# Altium PCB PCB1.pcbdoc (part 1 of 4)
Units mil, origin at the board's own origin, x right, y up, seen from the top; angles counter-clockwise.
Board outline 3067 x 4292.31 mil, 4 copper layers (Top Layer, Inner1, Inner2, Bottom Layer); 120 components, 131 nets, 693 pads, 342 vias.
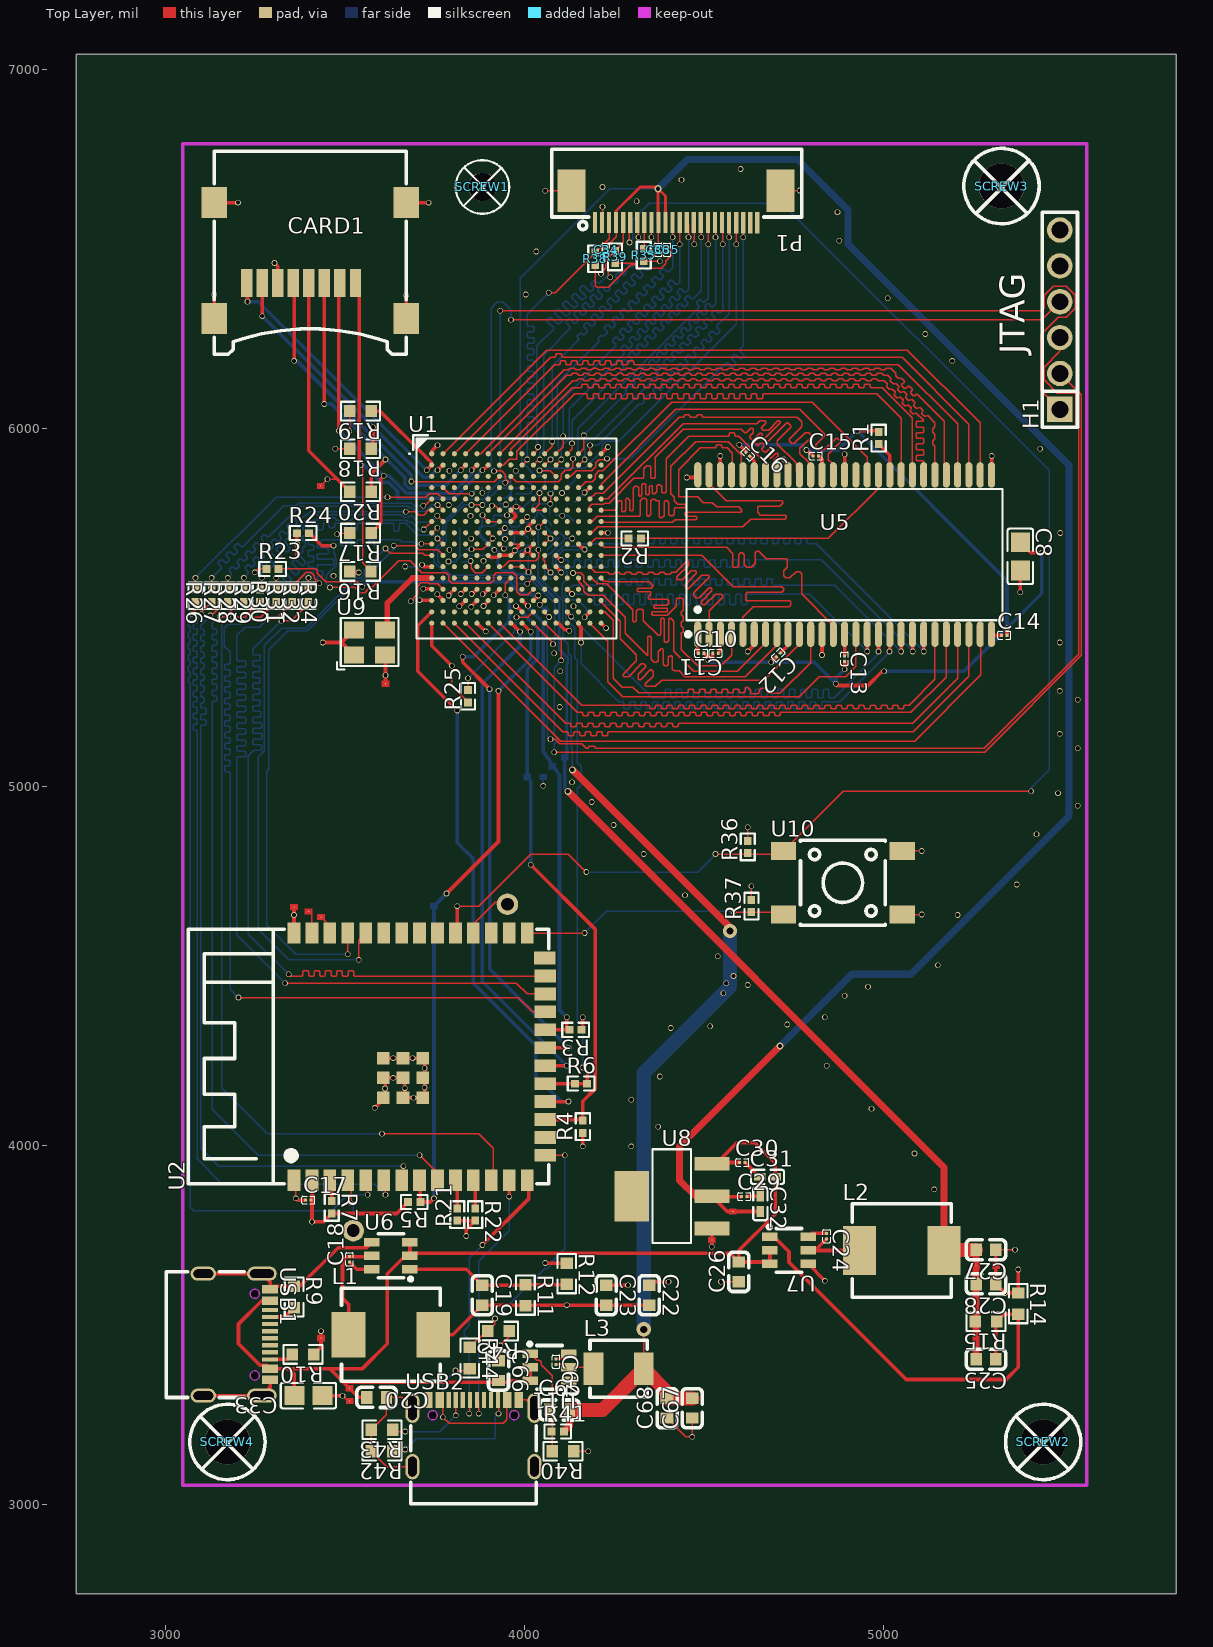
[diagram p0: Top Layer view]
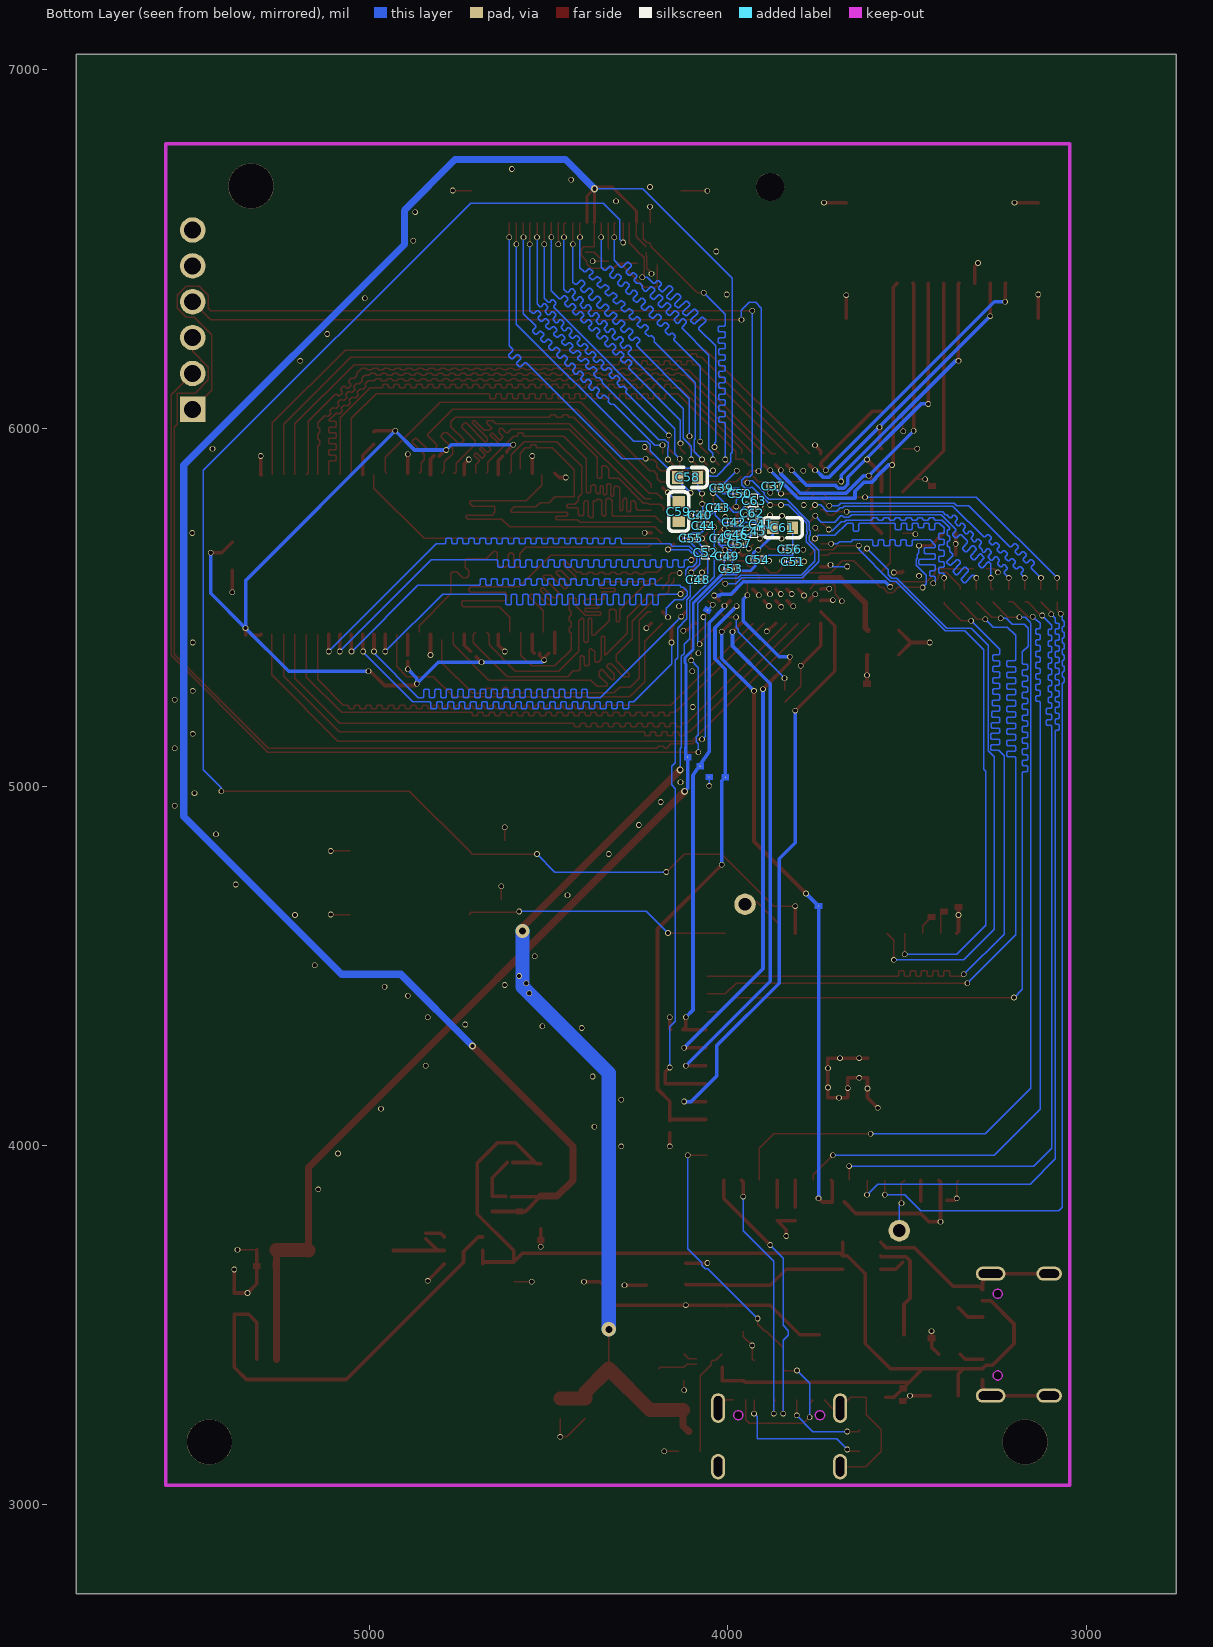
[diagram p1: Bottom Layer view, seen from below]
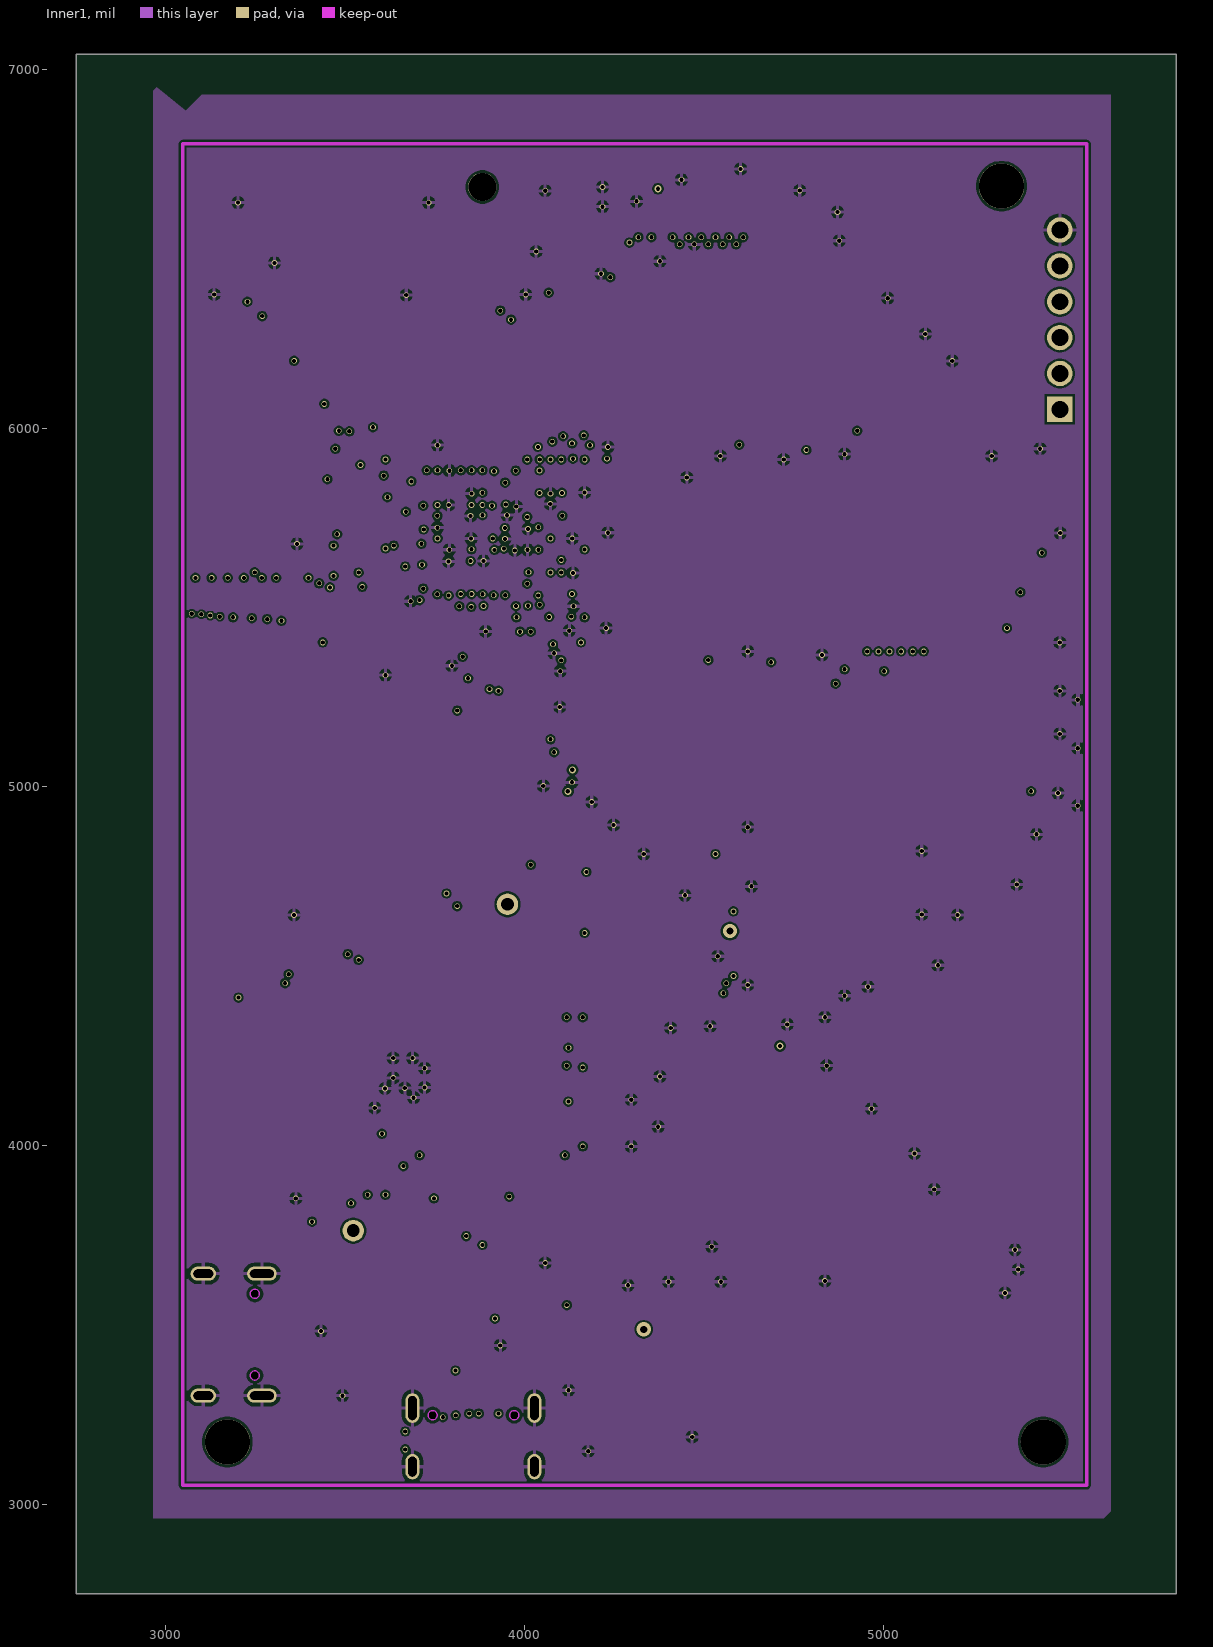
[diagram p2: Inner1]
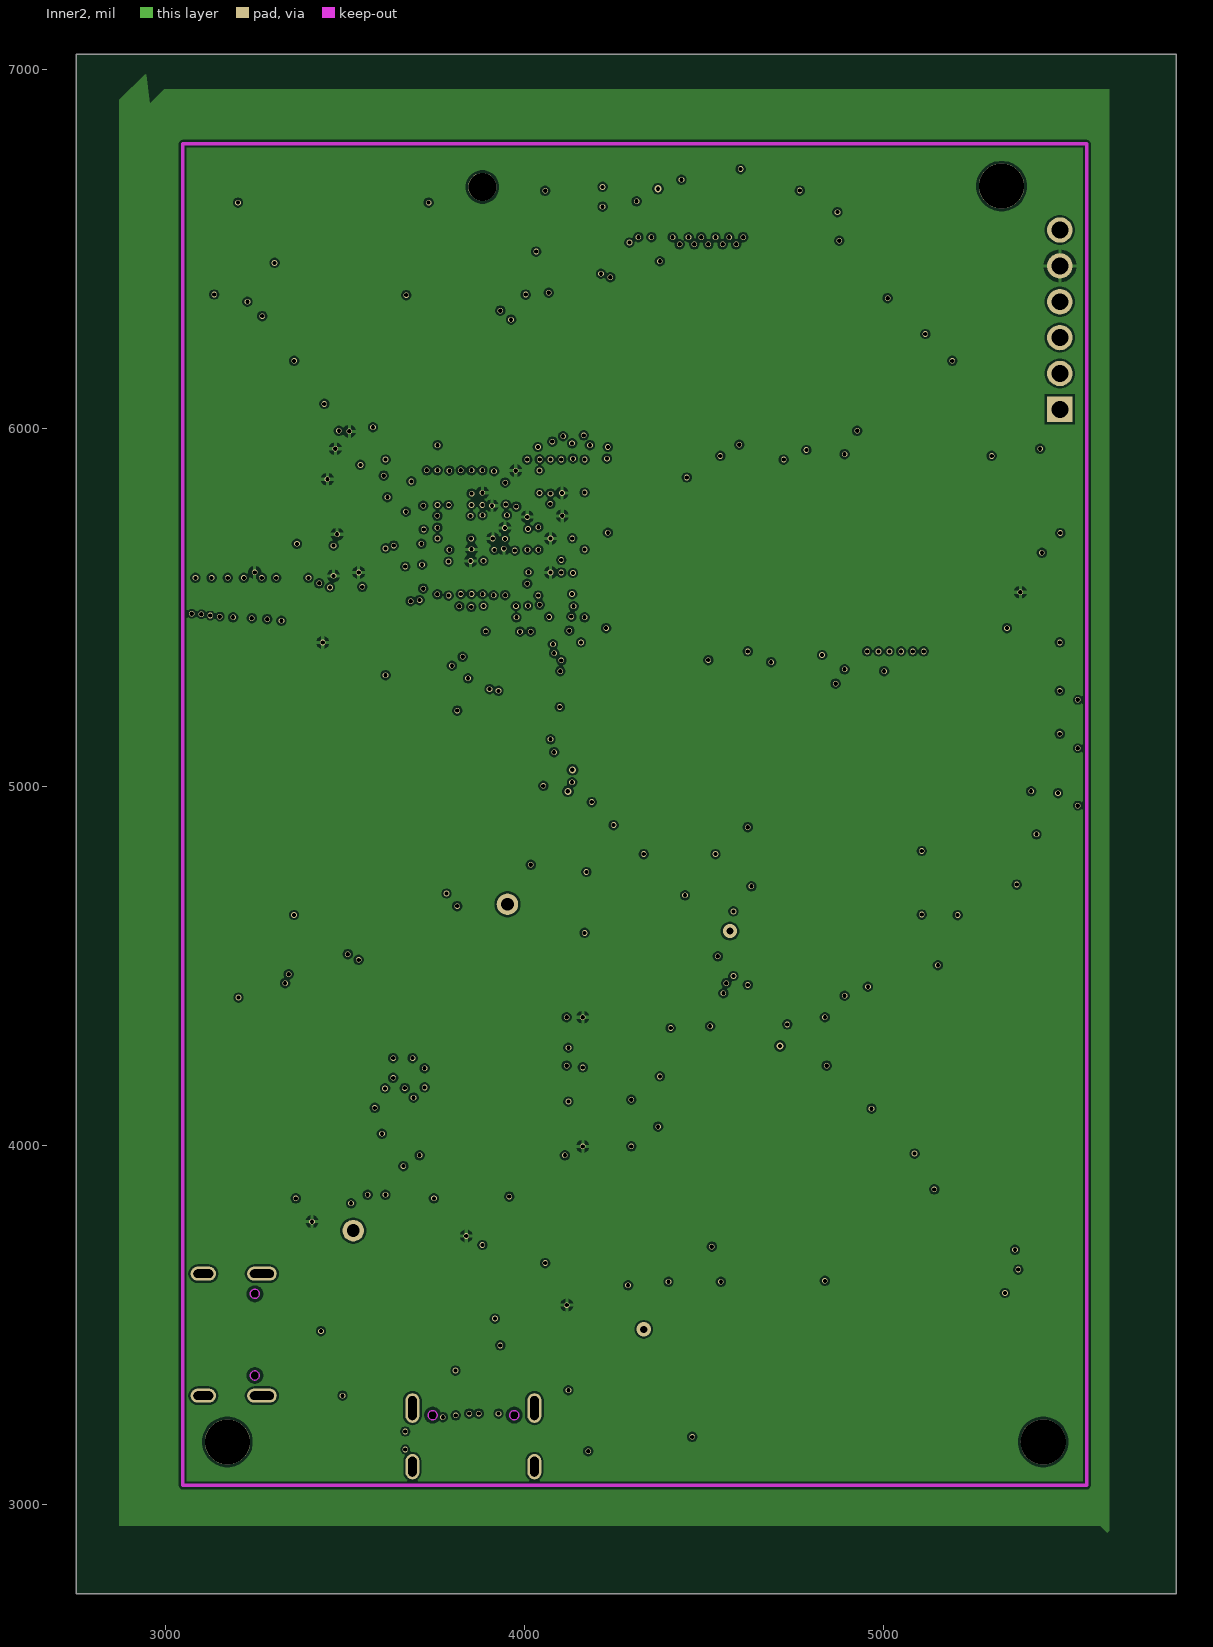
[diagram p3: Inner2]

## Layer stack, top to bottom
Top Solder Mask Layer: solder mask 0.4, Solder Resist, Dk 3.5
Top Layer: signal copper 1.4
Dielectric1: dielectric 12.6, FR-4, Dk 4.8
Inner1: signal copper 1.4
Dielectric5: dielectric 12.6, FR-4, Dk 4.8
Inner2: signal copper 1.4
Dielectric6: dielectric 12.6, FR-4, Dk 4.8
Bottom Layer: signal copper 1.4
Bottom Solder Mask Layer: solder mask 0.4, Solder Resist, Dk 3.5

## Board outline
5817,2750 2750,2750 2750,7042.31 5817,7042.31

## Design rules (kind name [scope] priority, off if disabled: settings)
BoardOutlineClearance copperThickness1oz_1 [All] p1: gap=10 ignorepadtopadclearanceinfootprint=FALSE except(0: Arc-SplitContinuation Track-SplitContinuation SMDPad-SplitContinuation THPad-SplitContinuation Via-SplitContinuation Fill-SplitContinuation Poly-SplitContinuation Region-SplitContinuation Text-SplitContinuation; 6: Track-CutoutEdge SMDPad-CutoutEdge THPad-CutoutEdge Via-CutoutEdge Region-CutoutEdge; 11.8: Track-OutlineEdge SMDPad-OutlineEdge THPad-OutlineEdge Via-OutlineEdge Fill-OutlineEdge Fill-CutoutEdge Poly-OutlineEdge Region-OutlineEdge Text-OutlineEdge)
BoardOutlineClearance copperThickness2oz_1 [All] p2: gap=10 ignorepadtopadclearanceinfootprint=FALSE except(0: Arc-SplitContinuation Track-SplitContinuation SMDPad-SplitContinuation THPad-SplitContinuation Via-SplitContinuation Fill-SplitContinuation Poly-SplitContinuation Region-SplitContinuation Text-SplitContinuation; 6: Track-CutoutEdge SMDPad-CutoutEdge THPad-CutoutEdge Via-CutoutEdge Region-CutoutEdge; 11.8: Track-OutlineEdge SMDPad-OutlineEdge THPad-OutlineEdge Via-OutlineEdge Fill-OutlineEdge Fill-CutoutEdge Poly-OutlineEdge Region-OutlineEdge Text-OutlineEdge)
Clearance copperThickness1oz [(InNet('SD_A0') OR InNet('SD_A1') OR InNet('SD_A2') OR InNet('SD_A3') OR InNet('SD_A4') OR InNet('SD_A5') OR InNet('SD_A6') OR InNet('SD_A7') OR InNet('SD_A8') OR InNet('SD_A9') OR InNet('SD_A10') OR InNet('SD_A11') OR InNet('SD_A12') OR InNet('SD_DQ15') OR InNet('SD_DQ14') OR InNet('SD_DQ8') OR InNet('SD_BA0') OR InNet('SD_BA1') OR InNet('SD_DQ9') OR InNet('SD_DQ7') OR InNet('SD_CLK') OR InNet('SD_WE_N') OR InNet('SD_DQ10') OR InNet('SD_CAS_N') OR InNet('SD_DQM1') OR InNet('SD_DQ2') OR InNet('SD_DQ3') OR InNet('SD_DQ11') OR InNet('SD_DQ12') OR InNet('SD_DQ13') OR InNet('SD_DQ0') OR InNet('SD_DQ1') OR InNet('SD_CS_N') OR InNet('SD_RAS_N') OR InNet('SD_DQ4') OR InNet('SD_DQ6') OR InNet('$1N9241') OR InNet('$1N9192') OR InNet('GND') OR InNet('$1N9142') OR InNet('SD_DQ5') OR InNet('$1N9091') OR InNet('SD_DQM0') OR InNet('$1N9039') OR InNet('$1N8986') OR InNet('$1N8318') OR InNet('$1N9437') OR InNet('$1N9341') OR InNet('+3V3') OR InNet('$1N11348') OR InNet('DOUT') OR InNet('DIN') OR InNet('CCLK') OR InNet('DONE') OR InNet('PROGRAMN') OR InNet('INITN') OR InNet('$1N11975') OR InNet('DN') OR InNet('DP') OR InNet('$1N14459') OR InNet('$1N14416') OR InNet('$1N14567') OR InNet('+5V') OR InNet('$1N16833') OR InNet('$1N16832') OR InNet('+1V1') OR InNet('$1N16834') OR InNet('+1V8') OR InNet('$1N17349') OR InNet('$1N12557') OR InNet('$1N12553') OR InNet('M_D2') OR InNet('M_D3') OR InNet('M_CMD') OR InNet('M_CLK') OR InNet('M_D0') OR InNet('M_D1') OR InNet('SDA') OR InNet('SCL') OR InNet('RESET') OR InNet('VSYNC') OR InNet('HREF') OR InNet('Y9') OR InNet('MCLK') OR InNet('Y8') OR InNet('Y7') OR InNet('PCLK') OR InNet('Y6') OR InNet('Y2') OR InNet('Y5') OR InNet('Y3') OR InNet('Y4') OR InNet('CRYSTAL') OR InNet('SSPI_CS_N') OR InNet('D0') OR InNet('D1') OR InNet('D2') OR InNet('D4') OR InNet('D3') OR InNet('D5') OR InNet('D6') OR InNet('D7') OR InNet('RX') OR InNet('TX') OR InNet('$1N29790') OR InNet('$1N29833') OR InNet('$1N29916') OR InNet('$1N29959') OR InNet('$1N30002') OR InNet('$1N30085') OR InNet('$1N30089') OR InNet('$1N30093') OR InNet('TDO') OR InNet('TDI') OR InNet('TMS') OR InNet('TCK') OR InNet('$1N33205') OR InNet('PROGRAM') OR InNet('$2N5507') OR InNet('$2N5509') OR InNet('$2N5511') OR InNet('FSDA') OR InNet('FSCL') OR InNet('+2V5') OR InNet('$1N60668') OR InNet('$1N60669') OR InNet('$1N60670') OR InNet('USB_VBUS') OR InNet('$1N63772') OR InNet('$1N63749') OR InNet('$1N63825'))] p1: gap=6 ignorepadtopadclearanceinfootprint=FALSE except(3.9: Track-Track; 6.9: Track-Hole SMDPad-Hole THPad-Hole Via-Hole Fill-Hole Poly-Hole Region-Hole Text-Hole; 7: Arc-Arc Arc-Track Arc-SMDPad Arc-THPad Arc-Via Arc-Fill Arc-Poly Arc-Region Arc-Text Arc-Hole; 11.8: Track-Fill Fill-Region)
Clearance copperThickness2oz [All] p2: gap=6 ignorepadtopadclearanceinfootprint=FALSE except(6.9: Track-Hole SMDPad-Hole THPad-Hole Via-Hole Fill-Hole Poly-Hole Region-Hole Text-Hole; 7: Arc-Arc Arc-Track Arc-SMDPad Arc-THPad Arc-Via Arc-Fill Arc-Poly Arc-Region Arc-Text Arc-Hole; 8: Track-Track; 11.8: Track-Fill Fill-Region)
DiffPairsRouting differentialPair [All] p1: maxlimit=6 minlimit=6 mostfreqgap=6 toplayer_minwidth=5 toplayer_maxwidth=100 toplayer_prefwidth=10 midlayer1_minwidth=5 midlayer1_maxwidth=100 midlayer1_prefwidth=10 midlayer2_minwidth=5 midlayer2_maxwidth=100 midlayer2_prefwidth=10 bottomlayer_minwidth=5 bottomlayer_maxwidth=100 bottomlayer_prefwidth=10 maxuncoupledlength=10
PasteMaskExpansion pasteMaskExpansion [All] p1: expansion=0
PlaneConnect innerPlane [All] p1: planeconnectstyle=Relief reliefexpansion=20 reliefentries=4 reliefconductorwidth=10 reliefairgap=10
PolygonConnect copperRegion [All] p1: connectstyle=Relief reliefconductorwidth=10 reliefentries=4 polygonreliefangle="90 Angle" airgapwidth=10
RoutingVias viaSize [All] p1: holewidth=11.81 width=15.75 viastyle="Through Hole" minholewidth=11.81 minwidth=15.75 maxholewidth=248.03 maxwidth=393.7
SolderMaskExpansion solderMaskExpansion [All] p1: expansion=2 istentingtop=FALSE useseparateexpansions=TRUE expansionbottom=2 istentingbottom=FALSE
Width copperThickness1oz_2 [All] p1: maxlimit=100 minlimit=4 preferedwidth=4
Width copperThickness2oz_2 [All] p2: maxlimit=100 minlimit=8 preferedwidth=10
27 further rules are at their usual default settings.

## Components (designator, comment, footprint, x,y, rotation, side; value= is the part's Value field where it differs from the comment)
C8 "CL21A476MQYNNNE" C0805 5382.31,5642.31 r270 top
C10 "GRM022R60J104KE15D" C01005 4492.31,5372.31 r0 top
C11 "GRM022R60J104KE15D" C01005 4532.31,5372.31 r180 top
C12 "GRM022R60J104KE15D" C01005 4707.31,5367.31 r225 top
C13 "GRM022R60J104KE15D" C01005 4892.31,5357.31 r270 top
C14 "GRM022R60J104KE15D" C01005 5337.31,5422.31 r0 top
C15 "GRM022R60J104KE15D" C01005 4812.31,5922.31 r0 top
C16 "GRM022R60J104KE15D" C01005 4622.31,5927.31 r315 top
C17 "GRM022R60J104KE15D" C01005 3397.32,3847.32 r0 top
C18 "GRM022R60J104KE15D" C01005 3512.32,3682.32 r90 top
C19 "TCC0603X7R104K500CT" C0603 3882.32,3582.32 r270 top
C20 "TCC0603X5R226M6R3CT" C0603 3587.32,3297.32 r180 top
C22 "TCC0603X5R226M6R3CT" C0603 4347.31,3582.32 r270 top
C23 "TCC0603X5R226M6R3CT" C0603 4227.31,3582.32 r270 top
C24 "GRM022R60J104KE15D" C01005 4842.31,3747.32 r270 top
C25 "TCC0603X7R104K500CT" C0603 5286.49,3403.85 r180 top
C26 "TCC0603X5R226M6R3CT" C0603 4597.31,3647.32 r90 top
C27 "TCC0603X5R226M6R3CT" C0603 5286.49,3708.85 r180 top
C28 "TCC0603X5R226M6R3CT" C0603 5286.49,3613.85 r180 top
C29 "GRM022R60J104KE15D" C01005 4612.31,3857.32 r0 top
C30 "GRM022R60J104KE15D" C01005 4607.31,3952.32 r0 top
C31 "GRM155R60J106ME44D" C0402 4677.31,3912.32 r0 top
C32 "GRM155R60J106ME44D" C0402 4657.31,3837.32 r270 top
C33 "CL21A476MQYNNNE" C0805 3397.32,3302.32 r180 top
C34 "GRM022R60J104KE15D" C01005 4227.31,6497.31 r270 top
C35 "GRM022R60J104KE15D" C01005 4397.31,6497.31 r270 top
C36 "GRM022R60J104KE15D" C01005 4372.31,6497.31 r270 top
C37 "GRM022R60J104KE15D" C01005 3872.32,5837.31 r180 bottom
C39 "GRM022R60J104KE15D" C01005 4017.32,5832.31 r180 bottom
C40 "GRM022R60J104KE15D" C01005 4077.32,5757.31 r180 bottom
C41 "GRM022R60J104KE15D" C01005 3907.32,5732.31 r90 bottom
C42 "GRM022R60J104KE15D" C01005 3982.32,5737.31 r180 bottom
C43 "GRM022R60J104KE15D" C01005 4027.32,5777.31 r180 bottom
C44 "GRM022R60J104KE15D" C01005 4067.32,5727.31 r180 bottom
C45 "GRM022R60J104KE15D" C01005 3927.32,5712.31 r270 bottom
C46 "GRM022R60J104KE15D" C01005 3977.32,5702.31 r180 bottom
C47 "GRM022R60J104KE15D" C01005 4017.32,5692.31 r0 bottom
C48 "GRM022R60J104KE15D" C01005 4082.32,5577.31 r180 bottom
C49 "GRM022R60J104KE15D" C01005 4002.32,5642.31 r180 bottom
C50 "GRM022R60J104KE15D" C01005 3967.32,5817.31 r180 bottom
C51 "GRM022R60J104KE15D" C01005 3817.32,5627.31 r180 bottom
C52 "GRM022R60J104KE15D" C01005 4062.32,5652.31 r270 bottom
C53 "GRM022R60J104KE15D" C01005 3992.32,5607.31 r180 bottom
C54 "GRM022R60J104KE15D" C01005 3917.32,5632.31 r180 bottom
C55 "GRM022R60J104KE15D" C01005 4102.31,5692.31 r0 bottom
C56 "GRM022R60J104KE15D" C01005 3827.32,5662.31 r180 bottom
C57 "GRM022R60J104KE15D" C01005 3967.32,5677.31 r0 bottom
C58 "TCC0603X5R226M6R3CT" C0603 4112.31,5862.31 r180 bottom
C59 "TCC0603X5R226M6R3CT" C0603 4137.31,5767.31 r90 bottom
C61 "TCC0603X5R226M6R3CT" C0603 3847.32,5722.31 r180 bottom
C62 "GRM022R60J104KE15D" C01005 3932.32,5762.31 r270 bottom
C63 "GRM022R60J104KE15D" C01005 3927.32,5797.31 r90 bottom
C64 "GRM022R60J104KE15D" C01005 4087.32,3397.32 r270 top
C65 "TCC0603X7R104K500CT" C0603 4097.31,3262.32 r0 top
C66 "TCC0603X5R226M6R3CT" C0603 3927.32,3372.32 r270 top
C67 "TCC0603X5R226M6R3CT" C0603 4467.31,3267.32 r90 top
C68 "TCC0603X5R226M6R3CT" C0603 4397.31,3267.32 r90 top
CARD1 "DS1139-06-08SS4BSR" TF-SMD_DS1139-06-08SS4BSR 3402.32,6467.31 r0 top
H1 "2.54-1x6P直针" HDR-TH_6P-P2.54-V-M-1 5492.31,6302.31 r90 top
L1 "FXL0630-6R8-M" IND-SMD_L7.0-W6.6 3627.32,3472.32 r0 top
L2 "FXL0630-100-M" IND-SMD_L7.3-W6.8 5051.68,3707.09 r0 top
L3 "SL0420-3R3M" IND-SMD_L4.5-W4.1_SL0420 4262.31,3377.32 r0 top
P1 "AFC07-S24FCC-00" FPC-SMD_AFC07-S24FCC-00 4422.31,6617.31 r180 top
R1 "0402WGF1002TCE" R0402 4987.31,5972.31 r90 top
R2 "0402WGF330JTCE" R0402 4307.31,5692.31 r180 top
R3 "0402WGF1002TCE" R0402 4142.31,4322.31 r180 top
R4 "0402WGF1002TCE" R0402 4162.31,4052.32 r90 top
R5 "0402WGF1002TCE" R0402 3692.32,3842.32 r180 top
R6 "0402WGF330JTCE" R0402 4157.31,4172.31 r0 top
R7 "0402WGF1002TCE" R0402 3462.32,3827.32 r270 top
R9 "0603WAF5101T5E" R0603 3357.32,3577.32 r270 top
R10 "0603WAF5101T5E" R0603 3382.32,3417.32 r180 top
R11 "FRC0603F1963TS" R0603 4002.32,3582.32 r270 top
R12 "FRC0603F6202TS" R0603 4117.31,3642.32 r270 top
R14 "FRC0603F6202TS" R0603 5376.49,3558.85 r270 top
R15 "0603WAF2322T5E" R0603 5286.49,3508.85 r180 top
R16 "FRC0603F6202TS" R0603 3542.16,5600.29 r180 top
R17 "FRC0603F6202TS" R0603 3542.32,5707.31 r180 top
R18 "FRC0603F6202TS" R0603 3542.32,5942.31 r180 top
R19 "FRC0603F6202TS" R0603 3542.32,6047.31 r180 top
R20 "FRC0603F6202TS" R0603 3542.32,5822.31 r180 top
R21 "0402WGF1002TCE" R0402 3812.32,3807.32 r270 top
R22 "0402WGF1002TCE" R0402 3862.32,3807.32 r270 top
R23 "0402WGF1002TCE" R0402 3297.32,5607.31 r0 top
R24 "0402WGF1002TCE" R0402 3382.32,5707.31 r0 top
R25 "0402WGF1002TCE" R0402 3842.32,5252.31 r90 top
R26 "0402WGF330JTCE" R0402 3082.32,5532.31 r270 top
R27 "0402WGF330JTCE" R0402 3127.32,5532.31 r270 top
R28 "0402WGF330JTCE" R0402 3172.32,5532.31 r270 top
R29 "0402WGF330JTCE" R0402 3217.32,5532.31 r270 top
R30 "0402WGF330JTCE" R0402 3262.32,5532.31 r270 top
R31 "0402WGF330JTCE" R0402 3307.32,5532.31 r270 top
R32 "0402WGF330JTCE" R0402 3352.32,5532.31 r270 top
R34 "0402WGF330JTCE" R0402 3397.32,5532.31 r270 top
R35 "0402WGF1002TCE" R0402 4332.31,6482.31 r270 top
R36 "0402WGF1002TCE" R0402 4622.31,4832.31 r90 top
R37 "0402WGF1002TCE" R0402 4632.31,4667.31 r90 top
R38 "0402WGF1002TCE" R0402 4197.31,6472.31 r270 top
R39 "0402WGF1002TCE" R0402 4252.31,6477.31 r270 top
R40 "FRC0603F6202TS" R0603 4107.31,3147.32 r180 top
R41 "RC0402FR-07130KL" R0402 4092.32,3202.32 r0 top
R42 "0603WAF5101T5E" R0603 3602.32,3147.32 r180 top
R43 "0603WAF5101T5E" R0603 3602.32,3207.32 r180 top
R44 "FRC0603F1963TS" R0603 3847.32,3407.32 r270 top
R45 "FRC0603F1963TS" R0603 3927.32,3482.32 r180 top
SCREW1 "Screw-Hole-M2" Screw-Hole-M2 3882.32,6672.31 r0 top
SCREW2 "Screw-Hole-M3" Screw-Hole-M3 5448.39,3170.66 r0 top
SCREW3 "Screw-Hole-M3" Screw-Hole-M3 5332.31,6672.31 r0 top
SCREW4 "Screw-Hole-M3" Screw-Hole-M3 3173.96,3170.66 r0 top
U1 "LFE5U-25F-6BG256C" CABGA-256_L14.0-W14.0-R16-C16-P0.80-TL 3977.32,5692.31 r0 top
U2 "ESP32-S3-WROOM-1-N16R2" WIRELM-SMD_ESP32-S3-WROOM-1 3707.32,4247.31 r90 top
U5 "W9825G6KH-6" TSOP-54_L22.2-W10.2-P0.80-LS11.8-BL 4892.31,5647.31 r0 top
U6 "AP63200WU-7" SOT-23-6_L2.9-W1.6-P0.95-LS2.8-BR 3627.32,3692.32 r0 top
U7 "AP63200WU-7" SOT-23-6_L2.9-W1.6-P0.95-LS2.8-BR 4737.31,3707.32 r180 top
U8 "AMS1117-1.8_C6185" SOT-223-4_L6.5-W3.5-P2.30-LS7.0-BR 4410.46,3858.45 r0 top
U9 "XOS32024000LT00351005" OSC-SMD_4P-L3.2-W2.5-BL 3567.32,5402.31 r0 top
U10 "TPS645-5NC60" SW-SMD_4P-L6.0-W6.0-P4.50-LS9.2 4887.31,4732.31 r0 top
U11 "AP63200WU-7" SOT-23-6_L2.9-W1.6-P0.95-LS2.8-BR 4069.4,3381.21 r180 top
USB1 "TYPE-C16PIN" USB-C-SMD_TYPE-C16PIN 3197.32,3472.32 r270 top
USB2 "TYPE-C16PIN" USB-C-SMD_TYPE-C16PIN 3857.32,3197.32 r0 top

## Footprints (in the part's own frame and the unit in brackets; to place one, negate y for a bottom-side part, rotate by r counter-clockwise, add the part's x,y. Pads: shape width x height; smd on the part's side, far side on the other; paste and mask are expansions set on the pad)
C0402 [mm]
  rect 0.79x0.54 smd paste-100 mask+0.051: 1(-0.545,0) 2(0.545,0)
  silkscreen extent -1.17,-0.5 1.17,0.5
C0603 [mm]
  rect 0.8x0.9 smd: 1(-0.7,0) 2(0.7,0)
  silkscreen extent -1.39,-0.71 1.39,0.71
C0805 [mm]
  rect 1.41x1.35 smd paste-100 mask+0.051: 1(-1,0) 2(1,0)
  silkscreen extent -1.96,-0.9 1.96,0.9
C01005 [mm]
  rect 0.21x0.22 smd: 1(-0.195,0) 2(0.195,0)
  silkscreen extent -0.46,-0.27 0.46,0.27
CABGA-256_L14.0-W14.0-R16-C16-P0.80-TL [mm]
  round 0.36 smd paste-100 mask+0.051: A1(-6,6) A2(-5.2,6) A3(-4.4,6) A4(-3.6,6) A5(-2.8,6) A6(-2,6) A7(-1.2,6) A8(-0.4,6) A9(0.4,6) A10(1.2,6) A11(2,6) A12(2.8,6) A13(3.6,6) A14(4.4,6) A15(5.2,6) A16(6,6) B1(-6,5.2) B2(-5.2,5.2) B3(-4.4,5.2) B4(-3.6,5.2) B5(-2.8,5.2) B6(-2,5.2) B7(-1.2,5.2) B8(-0.4,5.2) B9(0.4,5.2) B10(1.2,5.2) B11(2,5.2) B12(2.8,5.2) B13(3.6,5.2) B14(4.4,5.2) B15(5.2,5.2) B16(6,5.2) C1(-6,4.4) C2(-5.2,4.4) C3(-4.4,4.4) C4(-3.6,4.4) C5(-2.8,4.4) C6(-2,4.4) C7(-1.2,4.4) C8(-0.4,4.4) C9(0.4,4.4) C10(1.2,4.4) C11(2,4.4) C12(2.8,4.4) C13(3.6,4.4) C14(4.4,4.4) C15(5.2,4.4) C16(6,4.4) D1(-6,3.6) D2(-5.2,3.6) D3(-4.4,3.6) D4(-3.6,3.6) D5(-2.8,3.6) D6(-2,3.6) D7(-1.2,3.6) D8(-0.4,3.6) D9(0.4,3.6) D10(1.2,3.6) D11(2,3.6) D12(2.8,3.6) D13(3.6,3.6) D14(4.4,3.6) D15(5.2,3.6) D16(6,3.6) E1(-6,2.8) E2(-5.2,2.8) E3(-4.4,2.8) E4(-3.6,2.8) E5(-2.8,2.8) E6(-2,2.8) E7(-1.2,2.8) E8(-0.4,2.8) E9(0.4,2.8) E10(1.2,2.8) E11(2,2.8) E12(2.8,2.8) E13(3.6,2.8) E14(4.4,2.8) E15(5.2,2.8) E16(6,2.8) F1(-6,2) F2(-5.2,2) F3(-4.4,2) F4(-3.6,2) F5(-2.8,2) F6(-2,2) F7(-1.2,2) F8(-0.4,2) F9(0.4,2) F10(1.2,2) F11(2,2) F12(2.8,2) F13(3.6,2) F14(4.4,2) F15(5.2,2) F16(6,2) G1(-6,1.2) G2(-5.2,1.2) G3(-4.4,1.2) G4(-3.6,1.2) G5(-2.8,1.2) G6(-2,1.2) G7(-1.2,1.2) G8(-0.4,1.2) G9(0.4,1.2) G10(1.2,1.2) G11(2,1.2) G12(2.8,1.2) G13(3.6,1.2) G14(4.4,1.2) G15(5.2,1.2) G16(6,1.2) H1(-6,0.4) H2(-5.2,0.4) H3(-4.4,0.4) H4(-3.6,0.4) H5(-2.8,0.4) H6(-2,0.4) H7(-1.2,0.4) H8(-0.4,0.4) H9(0.4,0.4) H10(1.2,0.4) H11(2,0.4) H12(2.8,0.4) H13(3.6,0.4) H14(4.4,0.4) H15(5.2,0.4) H16(6,0.4) J1(-6,-0.4) J2(-5.2,-0.4) J3(-4.4,-0.4) J4(-3.6,-0.4) J5(-2.8,-0.4) J6(-2,-0.4) J7(-1.2,-0.4) J8(-0.4,-0.4) J9(0.4,-0.4) J10(1.2,-0.4) J11(2,-0.4) J12(2.8,-0.4) J13(3.6,-0.4) J14(4.4,-0.4) J15(5.2,-0.4) J16(6,-0.4) K1(-6,-1.2) K2(-5.2,-1.2) K3(-4.4,-1.2) K4(-3.6,-1.2) K5(-2.8,-1.2) K6(-2,-1.2) K7(-1.2,-1.2) K8(-0.4,-1.2) K9(0.4,-1.2) K10(1.2,-1.2) K11(2,-1.2) K12(2.8,-1.2) K13(3.6,-1.2) K14(4.4,-1.2) K15(5.2,-1.2) K16(6,-1.2) L1(-6,-2) L2(-5.2,-2) L3(-4.4,-2) L4(-3.6,-2) L5(-2.8,-2) L6(-2,-2) L7(-1.2,-2) L8(-0.4,-2) L9(0.4,-2) L10(1.2,-2) L11(2,-2) L12(2.8,-2) L13(3.6,-2) L14(4.4,-2) L15(5.2,-2) L16(6,-2) M1(-6,-2.8) M2(-5.2,-2.8) M3(-4.4,-2.8) M4(-3.6,-2.8) M5(-2.8,-2.8) M6(-2,-2.8) M7(-1.2,-2.8) M8(-0.4,-2.8) M9(0.4,-2.8) M10(1.2,-2.8) M11(2,-2.8) M12(2.8,-2.8) M13(3.6,-2.8) M14(4.4,-2.8) M15(5.2,-2.8) M16(6,-2.8) N1(-6,-3.6) N2(-5.2,-3.6) N3(-4.4,-3.6) N4(-3.6,-3.6) N5(-2.8,-3.6) N6(-2,-3.6) N7(-1.2,-3.6) N8(-0.4,-3.6) N9(0.4,-3.6) N10(1.2,-3.6) N11(2,-3.6) N12(2.8,-3.6) N13(3.6,-3.6) N14(4.4,-3.6) N15(5.2,-3.6) N16(6,-3.6) P1(-6,-4.4) P2(-5.2,-4.4) P3(-4.4,-4.4) P4(-3.6,-4.4) P5(-2.8,-4.4) P6(-2,-4.4) P7(-1.2,-4.4) P8(-0.4,-4.4) P9(0.4,-4.4) P10(1.2,-4.4) P11(2,-4.4) P12(2.8,-4.4) P13(3.6,-4.4) P14(4.4,-4.4) P15(5.2,-4.4) P16(6,-4.4) R1(-6,-5.2) R2(-5.2,-5.2) R3(-4.4,-5.2) R4(-3.6,-5.2) R5(-2.8,-5.2) R6(-2,-5.2) R7(-1.2,-5.2) R8(-0.4,-5.2) R9(0.4,-5.2) R10(1.2,-5.2) R11(2,-5.2) R12(2.8,-5.2) R13(3.6,-5.2) R14(4.4,-5.2) R15(5.2,-5.2) R16(6,-5.2) T1(-6,-6) T2(-5.2,-6) T3(-4.4,-6) T4(-3.6,-6) T5(-2.8,-6) T6(-2,-6) T7(-1.2,-6) T8(-0.4,-6) T9(0.4,-6) T10(1.2,-6) T11(2,-6) T12(2.8,-6) T13(3.6,-6) T14(4.4,-6) T15(5.2,-6) T16(6,-6)
  silkscreen extent -7.63,-7.08 7.08,7.3
FPC-SMD_AFC07-S24FCC-00 [mm]
  rect 0.3x1.5 smd: 1(5.745,1.129) 2(5.245,1.129) 3(4.746,1.129) 4(4.245,1.129) 5(3.746,1.129) 6(3.245,1.129) 7(2.746,1.129) 8(2.245,1.129) 9(1.746,1.129) 10(1.245,1.129) 11(0.746,1.129) 12(0.245,1.129) 13(-0.254,1.129) 14(-0.755,1.129) 15(-1.251,1.13) 16(-1.754,1.13) 17(-2.254,1.128) 18(-2.754,1.129) 19(-3.254,1.129) 20(-3.756,1.132) 21(-4.256,1.132) 22(-4.756,1.132) 23(-5.256,1.132) 24(-5.756,1.132)
  rect 2x3 smd: 25(-7.401,-1.132) 26(7.401,-1.125)
  silkscreen extent -8.89,-4.07 8.8,1.61
HDR-TH_6P-P2.54-V-M-1 [mm]
  rect 1.8x1.8 hole 1.2: 1(-6.35,0)
  round 1.8 hole 1.2: 2(-3.81,0) 3(-1.27,0) 4(1.27,0) 5(3.81,0) 6(6.35,0)
  silkscreen extent -7.62,-1.25 7.62,1.25
IND-SMD_L4.5-W4.1_SL0420 [mm]
  rect 1.4x2.3 smd paste+0 mask+0.05: 1(-1.775,0) 2(1.775,0)
  silkscreen extent -2.03,-2.03 2.03,2.03
IND-SMD_L7.0-W6.6 [mm]
  rect 2.4x3.2 smd: 1(-3,0) 2(3,0)
  silkscreen extent -3.5,-3.3 3.5,3.3
IND-SMD_L7.3-W6.8 [mm]
  rect 2.35x3.5 smd: 1(-3,0) 2(3,0)
  silkscreen extent -3.5,-3.3 3.5,3.3
OSC-SMD_4P-L3.2-W2.5-BL [mm]
  rect 1.4x1.2 smd: 1(-1.1,-0.875) 2(1.1,-0.875) 3(1.1,0.875) 4(-1.1,0.875)
  silkscreen extent -2.29,-1.9 2.07,1.72
R0402 [mm]
  rect 0.566x0.54 smd paste-100 mask+0.051: 1(-0.433,0) 2(0.433,0)
  silkscreen extent -0.94,-0.5 0.94,0.5
R0603 [mil]
  rect 31.75x34.02 smd paste-3937.01 mask+2: 1(-29.66,0) 2(29.66,0)
  silkscreen extent -55,-26 55,26
Screw-Hole-M2 [mm]
  round 2 hole 2: 1(0,0)
  silkscreen extent -1.9,-1.9 1.9,1.9
Screw-Hole-M3 [mil]
  round 126 hole 126 paste-99999 mask+4: 1(-2.5,2.5)
  silkscreen extent -107,-102 102,107
SOT-23-6_L2.9-W1.6-P0.95-LS2.8-BR [mm]
  rect 1.1x0.6 smd paste+0 mask+0.051: 1(1.35,-0.95) 2(1.35,0) 3(1.35,0.95) 4(-1.35,0.95) 5(-1.35,0) 6(-1.35,-0.95)
  silkscreen extent -0.9,-1.78 1.52,1.55
SOT-223-4_L6.5-W3.5-P2.30-LS7.0-BR [mm]
  rect 2.47x0.98 smd: 1(2.835,-2.3) 2(2.835,0) 3(2.835,2.3)
  rect 2.47x3.6 smd: 4(-2.835,0)
  silkscreen extent -1.37,-3.33 1.37,3.33
SW-SMD_4P-L6.0-W6.0-P4.50-LS9.2 [mm]
  rect 1.8x1.3 smd: 1(-4.2,2.25) 2(4.2,2.25) 3(-4.2,-2.25) 4(4.2,-2.25)
  silkscreen extent -3,-3 3,3
TF-SMD_DS1139-06-08SS4BSR [mm]
  rect 0.8x2 smd: 1(3.2,-1.6) 2(2.1,-1.6) 3(1,-1.6) 4(-0.1,-1.6) 5(-1.2,-1.6) 6(-2.3,-1.6) 7(-3.4,-1.6) 8(-4.5,-1.6)
  rect 1.8x2.2 smd: 9(-6.8,4.1) 10(-6.8,-4.1) 11(6.8,-4.1) 12(6.8,4.1)
  silkscreen extent -6.8,-6.65 6.8,7.75
TSOP-54_L22.2-W10.2-P0.80-LS11.8-BL [mm]
  oval 0.5x1.8 smd: 1(-10.4,-5.642) 2(-9.6,-5.642) 3(-8.8,-5.642) 4(-8,-5.642) 5(-7.2,-5.642) 6(-6.4,-5.642) 7(-5.6,-5.642) 8(-4.8,-5.642) 9(-4,-5.642) 10(-3.2,-5.642) 11(-2.4,-5.642) 12(-1.6,-5.642) 13(-0.8,-5.642) 14(0,-5.642) 15(0.8,-5.642) 16(1.6,-5.642) 17(2.4,-5.642) 18(3.2,-5.642) 19(4,-5.642) 20(4.8,-5.642) 21(5.6,-5.642) 22(6.4,-5.642) 23(7.2,-5.642) 24(8,-5.642) 25(8.8,-5.642) 26(9.6,-5.642) 27(10.4,-5.642) 28(10.4,5.642) 29(9.6,5.642) 30(8.8,5.642) 31(8,5.642) 32(7.2,5.642) 33(6.4,5.642) 34(5.6,5.642) 35(4.8,5.642) 36(4,5.642) 37(3.2,5.642) 38(2.4,5.642) 39(1.6,5.642) 40(0.8,5.642) 41(0,5.642) 42(-0.8,5.642) 43(-1.6,5.642) 44(-2.4,5.642) 45(-3.2,5.642) 46(-4,5.642) 47(-4.8,5.642) 48(-5.6,5.642) 49(-6.4,5.642) 50(-7.2,5.642) 51(-8,5.642) 52(-8.8,5.642) 53(-9.6,5.642) 54(-10.4,5.642)
  silkscreen extent -11.23,-5.79 11.19,4.65
USB-C-SMD_TYPE-C16PIN [mm]
  oval 1x2.1 hole 0.6 slot 1.7 at 90 deg: 1(-4.32,1.787) 2(4.32,1.787)
  oval 1x1.8 hole 0.6 slot 1.4 at 90 deg: 3(-4.32,-2.362) 4(4.32,-2.362)
  rect 0.6x1.15 smd paste-100 mask+0.051: A1B12(-3.2,2.362) A4B9(-2.4,2.362) B1A12(3.2,2.362) B4A9(2.4,2.362)
  rect 0.3x1.15 smd paste-100 mask+0.051: A5(-1.25,2.362) A6(-0.25,2.362) A7(0.25,2.362) A8(1.25,2.362) B5(1.75,2.362) B6(0.75,2.362) B7(-0.75,2.362) B8(-1.75,2.362)
  Board Outline Layer board cut-out: 2.89,1.613 2.955,1.613 3.074,1.564 3.166,1.472 3.215,1.353 3.215,1.223 3.166,1.104 3.074,1.013 2.955,0.963 2.89,0.963 2.825,0.963 2.706,1.013 2.614,1.104 2.565,1.223 2.565,1.353 2.614,1.472 2.706,1.564 2.825,1.613 2.89,1.613
  Board Outline Layer board cut-out: -2.89,1.613 -2.825,1.613 -2.706,1.564 -2.614,1.472 -2.565,1.353 -2.565,1.223 -2.614,1.104 -2.706,1.013 -2.825,0.963 -2.89,0.963 -2.955,0.963 -3.074,1.013 -3.166,1.104 -3.215,1.223 -3.215,1.353 -3.166,1.472 -3.074,1.564 -2.955,1.613 -2.89,1.613
  Board Outline Layer circle w0.005: c2.89,1.288 r0.325
  Board Outline Layer circle w0.005: c-2.89,1.288 r0.325
  Board Outline Layer region: 2.89,1.613 2.955,1.613 3.074,1.564 3.166,1.472 3.215,1.353 3.215,1.223 3.166,1.104 3.074,1.013 2.955,0.963 2.89,0.963 2.825,0.963 2.706,1.013 2.614,1.104 2.565,1.223 2.565,1.353 2.614,1.472 2.706,1.564 2.825,1.613 2.89,1.613
  Board Outline Layer region: -2.89,1.613 -2.825,1.613 -2.706,1.564 -2.614,1.472 -2.565,1.353 -2.565,1.223 -2.614,1.104 -2.706,1.013 -2.825,0.963 -2.89,0.963 -2.955,0.963 -3.074,1.013 -3.166,1.104 -3.215,1.223 -3.215,1.353 -3.166,1.472 -3.074,1.564 -2.955,1.613 -2.89,1.613
  silkscreen extent -4.45,-5 4.45,0.52
WIRELM-SMD_ESP32-S3-WROOM-1 [mm]
  rect 1.5x0.9 smd paste+0 mask+0.05: 1(-8.75,8.895) 2(-8.75,7.625) 3(-8.75,6.355) 4(-8.75,5.085) 5(-8.75,3.815) 6(-8.75,2.545) 7(-8.75,1.275) 8(-8.75,0.005) 9(-8.75,-1.265) 10(-8.75,-2.535) 11(-8.75,-3.805) 12(-8.75,-5.075) 13(-8.75,-6.345) 14(-8.75,-7.615) 27(8.75,-7.615) 28(8.75,-6.345) 29(8.75,-5.075) 30(8.75,-3.805) 31(8.75,-2.535) 32(8.75,-1.265) 33(8.75,0.005) 34(8.75,1.275) 35(8.75,2.545) 36(8.75,3.815) 37(8.75,5.085) 38(8.75,6.355) 39(8.75,7.625) 40(8.75,8.895)
  rect 0.9x1.5 smd paste+0 mask+0.05: 15(-6.985,-8.895) 16(-5.715,-8.895) 17(-4.445,-8.895) 18(-3.175,-8.895) 19(-1.905,-8.895) 20(-0.635,-8.895) 21(0.635,-8.895) 22(1.905,-8.895) 23(3.175,-8.895) 24(4.445,-8.895) 25(5.715,-8.895) 26(6.985,-8.865)
  rect 0.9x0.9 smd: 41(-2.9,-0.225) 41(-2.9,1.175) 41(-2.9,2.575) 41(-1.5,2.575) 41(-1.5,-0.225) 41(-1.5,1.175) 41(-0.1,2.575) 41(-0.1,1.175) 41(-0.1,-0.225)
  silkscreen extent -9,-9.14 9.02,16.39

## Free pads (board coordinates)
  round 60 hole 36: 1(3522.32,3762.32) 1(3952.32,4672.31)
  round 3.16 smd: 55(3357.12,4665) 55(3397.32,4652.31) 55(3431.11,5838.15) 55(3432.32,3462.32) 55(3432.32,4637.32) 55(3511.57,3323.06) 55(3512.32,3287.32) 55(3612.32,5287.31) 55(4522.07,3735.92) 55(4580.36,3815.86) 55(5258.93,3665.01) 55(5314.05,3663.47)
  round 3.16 smd far side: 55(3747.32,4667.31) 55(4007.32,5026.48) 55(4052.32,5027.32) 55(4057.32,5492.31) 55(4077.32,5057.31) 55(4112.31,5082.31)

## Via types
v1: diameter 15.75, hole 11.81, Top Layer to Bottom Layer, 336 vias
v2: diameter 19.68, hole 11.81, Top Layer to Bottom Layer, 4 vias
v3: diameter 39.37, hole 19.68, Top Layer to Bottom Layer, 2 vias

## Nets (pads, with @x,y where several pads share a name; then routed paths per layer and width w, separated by ;. In a path a pad name is that pad's centre, name@x,y a point inside that pad or via, vN(x,y) a via of type N, cw(c..) or ccw(c..) an arc to the next point about the centre after c; other vN are vias at no path point)
$1N8318: C15.2 U5.43 | length 56.7
  Top Layer w10: C15.2@4819.99,5922.31 4829.32,5912.98 U5.43@4829.32,5869.44
$1N8986: C16.2 U5.49 | length 57.7
  Top Layer w10: C16.2@4627.75,5921.88 4640.35,5909.28 U5.49@4640.35,5869.44
$1N9039: C14.1 U5.27 | length 29.1
  Top Layer w10: U5.27@5301.77,5425.19 5304.64,5422.31 C14.1@5329.64,5422.31
$1N9091: C13.1 U5.14 | length 57.9
  Top Layer w10: C13.1@4892.31,5367.31 U5.14@4892.31,5425.19
$1N9142: C12.1 U5.9 | length 55.1
  Top Layer w10: 4717.31,5377.31 4734.84,5394.84 U5.9@4734.84,5425.19
$1N9192: C11.1 U5.3 | length 55.3
  Top Layer w10: C11.1@4539.99,5372.31 4545.85,5378.18 U5.3@4545.85,5425.19
$1N9241: C10.1 U5.1 | length 57.9
  Top Layer w10: C10.1@4482.86,5372.31 U5.1@4482.86,5430.19
$1N9341: C8.1 C10.2 C11.2 C12.2 C13.2 C14.2 C15.1 C16.1 R1.2 | length 2608
  Top Layer w10: C10.2@4499.99,5372.31 4512.31,5359.99 v1(4512.31,5353.14) 4524.64,5365.46 C11.2@4524.64,5372.31 ; v1(4598.51,5953.51) 4616.88,5935.13 C16.1@4616.88,5932.75 ; v1(4687.31,5347.31) C12.2@4701.88,5361.88 ; v1(4785.74,5938.89) 4788.06,5938.89 C15.1@4804.64,5922.31 ; v1(4867.31,5287.31) 4872.31,5282.31 4957.31,5282.31 4997.31,5322.31 v1(5002.31,5322.31) ; v1(4892.31,5327.31) C13.2@4892.31,5349.64 ; v1(4927.31,5992.31) 4984.35,5992.31 R1.2@4987.31,5989.35 ; C14.2@5344.99,5422.31 v1(5344.99,5442.31) ; C8.1@5382.31,5681.69 5411.69,5652.31 v1(5442.31,5652.31)
  Bottom Layer w10: v1(4512.31,5353.14) 4518.14,5347.31 v1(4687.31,5347.31) 4807.31,5347.31 v1(4867.31,5287.31) 4867.31,5302.31 v1(4892.31,5327.31) ; v1(4598.51,5953.51) 4771.12,5953.51 v1(4785.74,5938.89) 4873.89,5938.89 v1(4927.31,5992.31) 5344.99,5574.64 v1(5344.99,5442.31) ; v1(5002.31,5322.31) 5224.99,5322.31 v1(5344.99,5442.31) ; v1(5442.31,5652.31) 5442.31,5539.64 v1(5344.99,5442.31)
$1N9437: R1.1 U5.37 | length 98.7
  Top Layer w10: R1.1@4987.31,5955.27 5018.3,5924.3 U5.37@5018.3,5869.44
$1N11348: R2.1 U5.38 | length 758.3
  Top Layer w3.94: R2.1@4324.35,5692.31 4847.31,5692.31 4987.31,5832.31 4987.31,5868.94 U5.38@4986.81,5869.44
$1N11975: R7.1 U2.3 | length 58.6
  Top Layer w10: U2.3@3462.12,3902.82 3462.32,3902.63 R7.1@3462.32,3844.36
$1N12553: R10.2 USB1.B5 | length 68.1
  Top Layer w10: USB1.B5@3290.32,3403.41 3338.76,3403.41 R10.2@3352.66,3417.32
$1N12557: R9.2 USB1.A5 | length 77.8
  Top Layer w10: USB1.A5@3290.32,3521.53 3331.18,3521.53 R9.2@3357.32,3547.66
$1N14416: C18.2 L1.1 U6.5 | length 300.8
  Top Layer w10: L1.1@3509.21,3472.32 3509.21,3557.32 3492.32,3574.21 3492.32,3678.63 3503.43,3689.75 3512.07,3689.75 C18.2@3512.32,3689.99 3571.84,3689.99 U6.5@3574.16,3692.32
$1N14459: C18.1 U6.6 | length 70
  Top Layer w10: C18.1@3512.32,3674.64 3532.03,3654.91 U6.6@3574.16,3654.91
$1N14567: C19.1 R11.1 R12.2 U6.1 | length 456.7
  Top Layer w10: U6.1@3680.47,3654.91 3837.28,3654.91 C19.1@3882.32,3609.88 4000.22,3609.88 R11.1@4002.32,3611.97 4116.64,3611.97 R12.2@4117.31,3612.66
$1N16832: C24.2 L2.1 U7.5 | length 208.4
  Top Layer w10: C24.2@4842.31,3739.64 4809.99,3707.32 U7.5@4790.47,3707.32 4790.69,3707.09 L2.1@4933.57,3707.09
$1N16833: C24.1 U7.6 | length 56.1
  Top Layer w10: U7.6@4790.47,3744.72 4800.5,3754.75 4842.07,3754.75 C24.1@4842.31,3754.99
$1N16834: C25.1 R14.2 R15.1 U7.1 | length 1210.5
  Top Layer w10: U7.1@4684.16,3744.72 4695.76,3744.72 4737.31,3703.16 4737.31,3674.07 5064.07,3347.32 5342.31,3347.32 5376.49,3381.49 R14.2@5376.49,3529.19 5336.49,3529.19 R15.1@5316.15,3508.85 5314.05,3506.75 C25.1@5314.05,3403.85
$1N17349: C29.2 C30.2 C31.1 C32.1 | length 149
  Top Layer w10: C30.2@4614.99,3952.32 4657.31,3909.99 C32.1@4657.31,3858.78 4621.45,3858.78 C29.2@4619.99,3857.32
$1N29790: R26.2 U2.5 | length 2277.7
  Top Layer w3.94: v1(3072,5482.31) 3082.32,5492.63 R26.2@3082.32,5515.27 ; U2.5@3562.12,3902.82 3562.32,3902.63 v1(3562.32,3862.32)
  Bottom Layer w3.94: v1(3072,5482.31) 3067.32,5477.63 3067.32,5465.32 3062.25,5460.26 3062.25,5449.58 3067.32,5444.51 3067.32,5433.83 3062.25,5428.76 3062.25,5418.08 3067.32,5413.01 3067.32,5402.33 3062.25,5397.26 3062.25,5386.58 3067.32,5381.52 3067.32,5370.84 3062.25,5365.77 3062.25,5355.09 3067.32,5350.02 3067.32,5339.34 3062.25,5334.27 3062.25,5323.59 3067.32,5318.52 3067.32,5307.84 3062.25,5302.78 3062.25,5292.1 3067.32,5287.03 3067.32,3827.32 3077.32,3817.32 3462.28,3817.32 3507.28,3862.32 v1(3562.32,3862.32)
$1N29833: R27.2 U2.6 | length 2330.5
  Top Layer w3.94: v1(3098.73,5480.9) 3098.73,5486.69 R27.2@3127.32,5515.27 ; v1(3612.12,3862.32) U2.6@3612.12,3902.82
  Bottom Layer w3.94: v1(3098.73,5480.9) 3087.32,5469.48 3087.32,5458.81 3084.53,5456.03 3079.13,5456.03 3076.34,5453.24 3076.34,5443.06 3079.13,5440.28 3084.53,5440.28 3087.32,5437.49 3087.32,5427.31 3084.53,5424.53 3079.13,5424.53 3076.34,5421.75 3076.34,5411.57 3079.13,5408.78 3084.53,5408.78 3087.32,5406 3087.32,5395.82 3084.53,5393.03 3079.13,5393.03 3076.34,5390.25 3076.34,5380.07 3079.13,5377.29 3084.53,5377.29 3087.32,5374.5 3087.32,5364.32 3084.53,5361.54 3079.13,5361.54 3076.34,5358.75 3076.34,5348.57 3079.13,5345.79 3084.53,5345.79 3087.32,5343.01 3087.32,5332.83 3084.53,5330.04 3079.13,5330.04 3076.34,5327.26 3076.34,5317.08 3079.13,5314.29 3084.53,5314.29 3087.32,5311.51 3087.32,5301.33 3084.53,5298.55 3079.13,5298.55 3076.34,5295.76 3076.34,5285.58 3079.13,5282.8 3084.53,5282.8 3087.32,5280.01 3087.32,5269.83 3084.53,5267.05 3079.13,5267.05 3076.34,5264.27 3076.34,5254.09 3079.13,5251.3 3084.53,5251.3 3087.32,5248.52 3087.32,5239.76 3084.53,5236.98 3079.13,5236.98 3076.34,5234.19 3076.34,5224.01 3079.13,5221.23 3084.53,5221.23 3087.32,5218.45 3087.32,5208.27 3084.53,5205.48 3079.13,5205.48 3076.34,5202.7 3076.34,5192.52 3079.13,5189.73 3084.53,5189.73 3087.32,5186.95 3087.32,5176.77 3084.53,5173.99 3079.13,5173.99 3076.34,5171.2 3076.34,5161.02 3079.13,5158.24 3084.53,5158.24 3087.32,5155.45 3087.32,3962.32 3157.32,3892.32 3582.12,3892.32 v1(3612.12,3862.32)
$1N29916: R29.2 U2.9 | length 2325.6
  Top Layer w3.94: v1(3150.36,5474.27) 3164.32,5474.27 3205.33,5515.27 R29.2@3217.32,5515.27 ; v1(3707.32,3972.32) 3762.12,3917.51 U2.9@3762.12,3902.82
  Bottom Layer w3.94: v1(3150.36,5474.27) 3142.41,5466.31 3140.18,5466.31 3129.44,5455.58 3129.44,5443.9 3132.22,5441.12 3139.53,5441.12 3142.32,5438.33 3142.32,5428.15 3139.53,5425.37 3132.22,5425.37 3129.44,5422.59 3129.44,5412.41 3132.22,5409.62 3139.53,5409.62 3142.32,5406.84 3142.32,5396.66 3139.53,5393.87 3132.22,5393.87 3129.44,5391.09 3129.44,5380.91 3132.22,5378.13 3139.53,5378.13 3142.32,5375.34 3142.32,5365.16 3139.53,5362.38 3132.22,5362.38 3129.44,5359.59 3129.44,5349.41 3132.22,5346.63 3139.53,5346.63 3142.32,5343.85 3142.32,5333.67 3139.53,5330.88 3132.22,5330.88 3129.44,5328.1 3129.44,5317.92 3132.22,5315.13 3139.53,5315.13 3142.32,5312.35 3142.32,5302.17 3139.53,5299.39 3132.22,5299.39 3129.44,5296.6 3129.44,5288.2 3132.22,5285.42 3139.53,5285.42 3142.32,5282.63 3142.32,5272.45 3139.53,5269.67 3132.22,5269.67 3129.44,5266.88 3129.44,5256.7 3132.22,5253.92 3139.53,5253.92 3142.32,5251.14 3142.32,5240.96 3139.53,5238.17 3132.22,5238.17 3129.44,5235.39 3129.44,4100.19 3257.32,3972.32 v1(3707.32,3972.32)
$1N29959: R30.2 U2.12 | length 2344.4
  Top Layer w3.94: v1(3187.32,5472.31) 3219.36,5472.31 R30.2@3262.32,5515.27 ; v1(3602.32,4032.32) 3872.32,4032.32 3912.12,3992.51 U2.12@3912.12,3902.82
  Bottom Layer w3.94: v1(3187.32,5472.31) 3170.8,5472.31 3156.92,5458.44 3156.92,5458.06 3155.19,5456.32 3155.19,4159.44 3282.32,4032.32 v1(3602.32,4032.32)
$1N30002: R31.2 U2.23 | length 2320.7
  Top Layer w3.94: v1(3202.32,4412.31) 3982.32,4412.31 4022.32,4372.31 U2.23@4057.51,4372.31 ; v1@3237.32,5472.31 3264.36,5472.31 R31.2@3307.32,5515.27
  Bottom Layer w3.94: v1(3202.32,4412.31) 3178.83,4435.8 3178.83,5039.64 3176.05,5042.42 3167,5042.42 3164.22,5045.2 3164.22,5055.38 3167,5058.17 3176.05,5058.17 3178.83,5060.95 3178.83,5071.13 3176.05,5073.92 3167,5073.92 3164.22,5076.7 3164.22,5086.88 3167,5089.66 3176.05,5089.66 3178.83,5092.45 3178.83,5102.63 3176.05,5105.41 3167,5105.41 3164.22,5108.2 3164.22,5118.38 3167,5121.16 3176.05,5121.16 3178.83,5123.94 3178.83,5134.12 3176.05,5136.91 3167,5136.91 3164.22,5139.69 3164.22,5149.87 3167,5152.66 3176.05,5152.66 3178.83,5155.44 3178.83,5165.62 3176.05,5168.4 3167,5168.4 3164.22,5171.19 3164.22,5181.37 3167,5184.15 3176.05,5184.15 3178.83,5186.94 3178.83,5197.12 3176.05,5199.9 3167,5199.9 3164.22,5202.68 3164.22,5212.86 3167,5215.65 3176.05,5215.65 3178.83,5218.43 3178.83,5228.61 3176.05,5231.4 3167,5231.4 3164.22,5234.18 3164.22,5244.36 3167,5247.14 3176.05,5247.14 3178.83,5249.93 3178.83,5260.11 3176.05,5262.89 3167,5262.89 3164.22,5265.68 3164.22,5275.86 3167,5278.64 3176.05,5278.64 3178.83,5281.42 3178.83,5291.6 3176.05,5294.39 3167,5294.39 3164.22,5297.17 3164.22,5307.35 3167,5310.14 3176.05,5310.14 3178.83,5312.92 3178.83,5323.1 3176.05,5325.88 3167,5325.88 3164.22,5328.67 3164.22,5338.85 3167,5341.63 3176.05,5341.63 3178.83,5344.42 3178.83,5375.8 3163.06,5391.57 3163.06,5442.07 3174.06,5453.06 3207.49,5453.06 3224.53,5470.1 v1(3239.53,5470.1)
$1N30085: R34.2 U2.25 | length 2337.5
  Top Layer w3.94: v1@3322.32,5462.31 3349.36,5462.31 3397.32,5510.27 R34.2@3397.32,5515.27 ; v1(3342.32,4477.31) 3347.32,4472.31 3379.13,4472.31 3381.92,4475.1 3381.92,4484.53 3384.7,4487.31 3394.88,4487.31 3397.67,4484.53 3397.67,4475.1 3400.45,4472.31 3410.63,4472.31 3413.41,4475.1 3413.41,4484.53 3416.2,4487.31 3426.38,4487.31 3429.16,4484.53 3429.16,4475.1 3431.95,4472.31 3442.13,4472.31 3444.91,4475.1 3444.91,4484.53 3447.69,4487.31 3457.87,4487.31 3460.66,4484.53 3460.66,4475.1 3463.44,4472.31 3473.62,4472.31 3476.41,4475.1 3476.41,4484.53 3479.19,4487.31 3489.37,4487.31 3492.15,4484.53 3492.15,4475.1 3494.94,4472.31 3505.12,4472.31 3507.9,4475.1 3507.9,4484.53 3510.69,4487.31 3520.87,4487.31 3523.65,4484.53 3523.65,4475.1 3526.43,4472.31 U2.25@4057.51,4472.31
  Bottom Layer w3.94: v1(3322.03,5462.6) 3242.32,5382.89 3242.32,5370.27 3245.1,5367.49 3259.53,5367.49 3262.32,5364.7 3262.32,5354.52 3259.53,5351.74 3245.1,5351.74 3242.32,5348.95 3242.32,5338.77 3245.1,5335.99 3259.12,5335.99 3261.91,5333.21 3261.91,5323.02 3259.12,5320.24 3245.1,5320.24 3242.32,5317.46 3242.32,5307.28 3245.1,5304.49 3259.48,5304.49 3262.26,5301.71 3262.26,5291.53 3259.48,5288.74 3245.1,5288.74 3242.32,5285.96 3242.32,5275.78 3245.1,5273 3259.12,5273 3261.91,5270.21 3261.91,5260.03 3259.12,5257.25 3245.1,5257.25 3242.32,5254.47 3242.32,5244.28 3245.1,5241.5 3260.89,5241.5 3263.67,5238.72 3263.67,5228.54 3260.89,5225.75 3245.1,5225.75 3242.32,5222.97 3242.32,5212.79 3245.1,5210 3261.95,5210 3264.73,5207.22 3264.73,5197.04 3261.95,5194.26 3245.1,5194.26 3242.32,5191.47 3242.32,5181.29 3245.1,5178.51 3263.71,5178.51 3266.5,5175.72 3266.5,5165.54 3263.71,5162.76 3245.1,5162.76 3242.32,5159.98 3242.32,5151.55 3245.1,5148.77 3263.97,5148.77 3266.76,5145.98 3266.76,5135.8 3263.97,5133.02 3245.1,5133.02 3242.32,5130.23 3242.32,5120.05 3245.1,5117.27 3263.97,5117.27 3266.76,5114.49 3266.76,5104.31 3263.97,5101.52 3245.1,5101.52 3230.19,5086.61 3230.19,4589.44 v1(3342.32,4477.31)
$1N30089: R32.2 U2.24 | length 2348
  Top Layer w3.94: v1(3282.32,5467.31) 3304.36,5467.31 R32.2@3352.32,5515.27 ; v1(3332.32,4452.31) 3977.32,4452.31 4007.32,4422.31 U2.24@4057.51,4422.31
  Bottom Layer w3.94: v1(3282.32,5467.31) 3260.19,5445.19 3220.77,5445.19 3197.32,5421.73 3197.32,5353.55 3200.1,5350.77 3219.53,5350.77 3222.32,5347.98 3222.32,5337.8 3219.53,5335.02 3200.1,5335.02 3197.32,5332.23 3197.32,5322.05 3200.1,5319.27 3219.53,5319.27 3222.32,5316.49 3222.32,5306.31 3219.53,5303.52 3200.1,5303.52 3197.32,5300.74 3197.32,5290.56 3200.1,5287.77 3219.53,5287.77 3222.32,5284.99 3222.32,5274.81 3219.53,5272.03 3200.1,5272.03 3197.32,5269.24 3197.32,5259.06 3200.1,5256.28 3219.53,5256.28 3222.32,5253.49 3222.32,5243.31 3219.53,5240.53 3200.1,5240.53 3197.32,5237.75 3197.32,5227.57 3200.1,5224.78 3219.53,5224.78 3222.32,5222 3222.32,5211.82 3219.53,5209.03 3200.1,5209.03 3197.32,5206.25 3197.32,5196.07 3200.1,5193.29 3219.53,5193.29 3222.32,5190.5 3222.32,5180.32 3219.53,5177.54 3200.1,5177.54 3197.32,5174.75 3197.32,5164.57 3200.1,5161.79 3219.53,5161.79 3222.32,5159.01 3222.32,5148.82 3219.53,5146.04 3200.1,5146.04 3197.32,5143.26 3197.32,5133.08 3200.1,5130.29 3219.53,5130.29 3222.32,5127.51 3222.32,5117.33 3219.53,5114.55 3200.1,5114.55 3197.32,5111.76 3197.32,5101.58 3200.1,5098.8 3219.53,5098.8 3222.32,5096.01 3222.32,5085.83 3219.53,5083.05 3200.1,5083.05 3197.32,5080.27 3197.32,4587.31 v1(3332.32,4452.31)
$1N30093: R28.2 U2.7 | length 2326.6
  Top Layer w3.94: v1(3123.63,5477.31) 3126.03,5477.31 3163.99,5515.27 R28.2@3172.32,5515.27 ; U2.7@3662.12,3902.82 v1(3662.12,3942.32)
  Bottom Layer w3.94: v1(3123.63,5477.31) 3097.32,5451 3097.32,5441.39 3100.1,5438.61 3104.53,5438.61 3107.32,5435.82 3107.32,5425.64 3104.53,5422.86 3100.1,5422.86 3097.32,5420.08 3097.32,5409.9 3100.1,5407.11 3104.53,5407.11 3107.32,5404.33 3107.32,5394.15 3104.53,5391.36 3100.1,5391.36 3097.32,5388.58 3097.32,5378.4 3100.1,5375.62 3104.53,5375.62 3107.32,5372.83 3107.32,5362.65 3104.53,5359.87 3100.1,5359.87 3097.32,5357.08 3097.32,5346.9 3100.1,5344.12 3104.53,5344.12 3107.32,5341.34 3107.32,5331.16 3104.53,5328.37 3100.1,5328.37 3097.32,5325.59 3097.32,5315.41 3100.1,5312.62 3104.53,5312.62 3107.32,5309.84 3107.32,5299.66 3104.53,5296.88 3100.1,5296.88 3097.32,5294.09 3097.32,5283.91 3100.1,5281.13 3104.53,5281.13 3107.32,5278.34 3107.32,5268.16 3104.53,5265.38 3100.1,5265.38 3097.32,5262.6 3097.32,5252.42 3100.1,5249.63 3104.53,5249.63 3107.32,5246.85 3107.32,5236.67 3104.53,5233.88 3100.1,5233.88 3097.32,5231.1 3097.32,5221.24 3100.1,5218.46 3109.53,5218.46 3112.32,5215.68 3112.32,5205.5 3109.53,5202.71 3100.1,5202.71 3097.32,5199.93 3097.32,5189.75 3100.1,5186.96 3109.53,5186.96 3112.32,5184.18 3112.32,5174 3109.53,5171.22 3100.1,5171.22 3097.32,5168.43 3097.32,3992.32 3147.32,3942.32 v1(3662.12,3942.32)
$1N33205: P1.8 R35.1 | length 74.2
  Top Layer w3.94: R35.1@4332.31,6499.35 4333.91,6500.95 P1.8@4333.91,6572.88
$1N60668: C64.1 U11.6 | length 40.9
  Top Layer w3.94: C64.1@4087.32,3404.99 4108.93,3404.99 U11.6@4122.55,3418.61
$1N60669: C64.2 L3.1 U11.5 | length 110.2
  Top Layer w3.94: C64.2@4087.32,3389.64 4114.13,3389.64 U11.5@4122.55,3381.21 4188.54,3381.21 L3.1@4192.43,3377.32
$1N60670: C65.1 R40.2 R41.1 U11.1 | length 301
  Top Layer w3.94: U11.1@4016.25,3418.61 4033.89,3400.98 4041.2,3400.98 4045.86,3396.32 4045.86,3389.01 4077.66,3357.21 R40.2@4077.66,3147.32
$1N63749: R43.1 USB2.A5 | length 239.9
  Top Layer w3.94: R43.1@3631.97,3207.32 3636.97,3202.32 v1(3667.32,3202.32) ; v1(3808.11,3247.32) USB2.A5@3808.11,3290.32
  Bottom Layer w3.94: v1(3667.32,3202.32) 3763.11,3202.32 v1(3808.11,3247.32)
$1N63772: R42.1 USB2.B5 | length 412.4
  Top Layer w3.94: R42.1@3631.97,3147.32 3662.32,3147.32 v1(3667.32,3152.32) ; USB2.B5@3926.22,3290.32 3927.32,3289.22 v1(3927.32,3252.32)
  Bottom Layer w3.94: v1(3667.32,3152.32) 3697.32,3182.32 3917.32,3182.32 3918.41,3183.41 3918.41,3243.41 v1(3927.32,3252.32)
$1N63825: R44.2 USB2.A4B9 USB2.B4A9 | length 483.7
  Top Layer w3.94: USB2.A4B9@3762.82,3290.32 3772.32,3280.84 v1(3772.32,3242.32) 3789.61,3225.02 3940.02,3225.02 3950.35,3235.35 3950.35,3288.87 USB2.B4A9@3951.8,3290.32 ; v1(3807.32,3372.32) 3841.97,3372.32 R44.2@3847.32,3377.66
  Bottom Layer w3.94: v1(3772.32,3242.32) 3772.32,3337.32 v1(3807.32,3372.32)